# Altium PCB SQUIDCtr_Rev2.PcbDoc (part 4 of 4)
Units mil, origin at the board's own origin, x right, y up, seen from the top; angles counter-clockwise.
Board outline 5863.43 x 2940 mil, 6 copper layers (Top Layer, Internal Plane 1, Mid-Layer 1, InternalPlane 2, Mid-Layer 2, Bottom Layer), stack 62.5 mil thick; 614 components, 343 nets, 1599 pads, 475 vias.
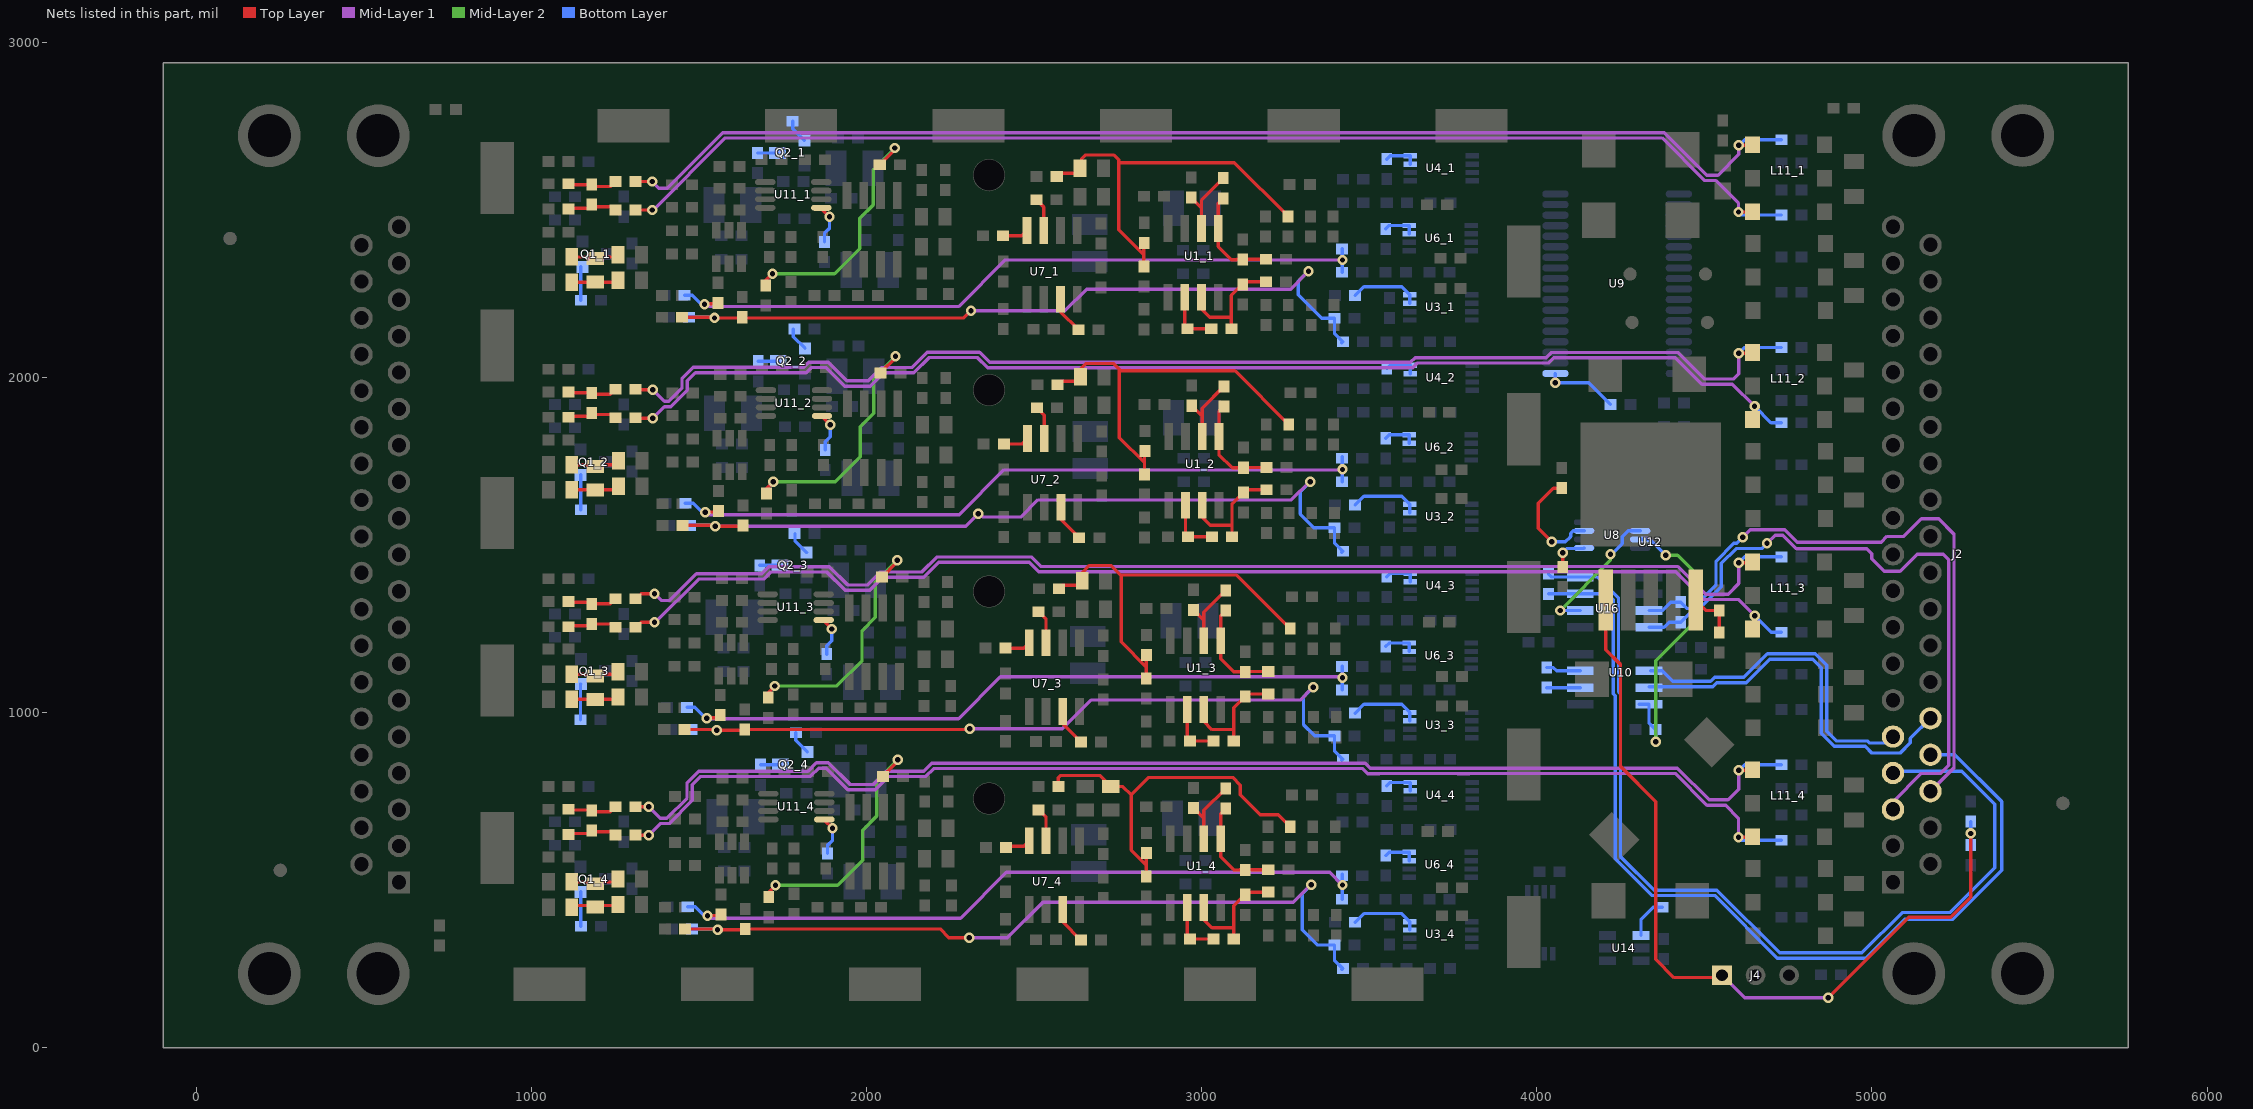
[diagram p8: the nets of this part, all layers, seen from the top]

## Via types
v1: diameter 31, hole 16, Top Layer to Bottom Layer, tented both sides, 475 vias

## Nets (pads, with @x,y where several pads share a name; then routed paths per layer and width w, separated by ;. In a path a pad name is that pad's centre, name@x,y a point inside that pad or via, vN(x,y) a via of type N, cw(c..) or ccw(c..) an arc to the next point about the centre after c; other vN are vias at no path point) (continued)
NetQ1_1_1: Q1_1.1 R6_1.1 | length 100
  Bottom Layer w10: R6_1.1@1148,2231 Q1_1.1@1148,2331
NetQ1_2_1: Q1_2.1 R6_2.1 | length 105
  Bottom Layer w10: R6_2.1@1148,1606 Q1_2.1@1148,1711
NetQ1_3_1: Q1_3.1 R6_3.1 | length 107.4
  Bottom Layer w10: R6_3.1@1147,979 1147,1085 Q1_3.1@1148,1086
NetQ1_4_1: Q1_4.1 R6_4.1 | length 103
  Bottom Layer w10: R6_4.1@1148,363 Q1_4.1@1148,466
NetQ2_1_1: Q2_1.1 R34_1.2 | length 71.5
  Bottom Layer w10: R34_1.2@1780,2765 1780,2743 Q2_1.1@1815,2708
NetQ2_1_3: Q2_1.3 R62_1.2 | length 60
  Bottom Layer w10: R62_1.2@1675,2670 Q2_1.3@1735,2670
NetQ2_2_1: Q2_2.1 R34_2.2 | length 71.5
  Bottom Layer w10: R34_2.2@1782,2144 1782,2122 Q2_2.1@1817,2087
NetQ2_2_3: Q2_2.3 R62_2.2 | length 60
  Bottom Layer w10: R62_2.2@1677,2049 Q2_2.3@1737,2049
NetQ2_3_1: Q2_3.1 R34_3.2 | length 71.5
  Bottom Layer w10: R34_3.2@1787,1535 1787,1513 Q2_3.1@1822,1478
NetQ2_3_3: Q2_3.3 R62_3.2 | length 60
  Bottom Layer w10: R62_3.2@1682,1440 Q2_3.3@1742,1440
NetQ2_4_1: Q2_4.1 R34_4.2 | length 71.5
  Bottom Layer w10: R34_4.2@1789,940 1789,918 Q2_4.1@1824,883
NetQ2_4_3: Q2_4.3 R62_4.2 | length 60
  Bottom Layer w10: R62_4.2@1684,845 Q2_4.3@1744,845
NetR1_1_2: R1_1.2 R2_1.2 R3_1.1 | length 140
  Top Layer w10: R1_1.2@1121,2360 R2_1.2@1261,2360
NetR1_2_2: R1_2.2 R2_2.2 R3_2.1 | length 140
  Top Layer w10: R1_2.2@1121,1740 R2_2.2@1261,1740
NetR1_3_2: R1_3.2 R2_3.2 R3_3.1 | length 140
  Top Layer w10: R1_3.2@1121,1115 R2_3.2@1261,1115
NetR1_4_2: R1_4.2 R2_4.2 R3_4.1 | length 140
  Top Layer w10: R1_4.2@1121,495 R2_4.2@1261,495
NetR3_1_2: R3_1.2 R5_1.2 R10_1.2 | length 142.1
  Top Layer w10: R5_1.2@1121,2285 R3_1.2@1191,2285 1256,2285 R10_1.2@1261,2290
NetR3_2_2: R3_2.2 R5_2.2 R10_2.2 | length 142.1
  Top Layer w10: R5_2.2@1121,1665 R3_2.2@1191,1665 1256,1665 R10_2.2@1261,1670
NetR3_3_2: R3_3.2 R5_3.2 R10_3.2 | length 142.1
  Top Layer w10: R5_3.2@1121,1040 R3_3.2@1191,1040 1256,1040 R10_3.2@1261,1045
NetR3_4_2: R3_4.2 R5_4.2 R10_4.2 | length 142.1
  Top Layer w10: R5_4.2@1121,420 1126,425 R10_4.2@1261,425
NetR8_1_1: R8_1.1 R9_1.1 U1_1.6 | length 168.3
  Top Layer w10: U1_1.6@2950,2240 2950,2154 R9_1.1@2958,2146 R8_1.1@3029,2146
NetR8_1_2: R8_1.2 R13_1.1 R14_1.1 U1_1.7 | length 353.9
  Top Layer w10: U1_1.7@3000,2240 3000,2204 3024,2180 3089,2180 ; R8_1.2@3089,2146 3089,2180 ; R13_1.1@3192,2286 3131,2286 R14_1.1@3123,2278 3122,2278 3089,2245 3089,2180
NetR8_2_1: R8_2.1 R9_2.1 U1_2.6 | length 168.3
  Top Layer w10: U1_2.6@2952,1619 2952,1533 R9_2.1@2960,1525 R8_2.1@3031,1525
NetR8_2_2: R8_2.2 R13_2.1 R14_2.1 U1_2.7 | length 353.9
  Top Layer w10: U1_2.7@3002,1619 3002,1583 3026,1559 3091,1559 ; R8_2.2@3091,1525 3091,1559 ; R13_2.1@3194,1665 3133,1665 R14_2.1@3125,1657 3124,1657 3091,1624 3091,1559
NetR8_3_1: R8_3.1 R9_3.1 U1_3.6 | length 168.3
  Top Layer w10: U1_3.6@2957,1010 2957,924 R9_3.1@2965,916 R8_3.1@3036,916
NetR8_3_2: R8_3.2 R13_3.1 R14_3.1 U1_3.7 | length 353.9
  Top Layer w10: U1_3.7@3007,1010 3007,974 3031,950 3096,950 ; R8_3.2@3096,916 3096,950 ; R13_3.1@3199,1056 3138,1056 R14_3.1@3130,1048 3129,1048 3096,1015 3096,950
NetR8_4_1: R8_4.1 R9_4.1 U1_4.6 | length 168.3
  Top Layer w10: U1_4.6@2957,419 2957,333 R9_4.1@2965,325 R8_4.1@3036,325
NetR8_4_2: R8_4.2 R13_4.1 R14_4.1 U1_4.7 | length 353.9
  Top Layer w10: U1_4.7@3007,419 3007,383 3031,359 3096,359 ; R8_4.2@3096,325 3096,359 ; R13_4.1@3199,465 3138,465 R14_4.1@3130,457 3129,457 3096,424 3096,359
NetR15_1: R15.1 U10.6 | length 100
  Bottom Layer w10: R15.1@4030,1075 U10.6@4130,1075
NetR15_2: R15.2 U10.7 | length 104.1
  Bottom Layer w10: R15.2@4030,1135 4050,1135 4060,1125 U10.7@4130,1125
NetR16_1: R16.1 U9.1 | length 219.6
  Bottom Layer w10: U9.1@4055.94,2012.28 4055,2011.34 v1(4055,1985) 4155,1985 R16.1@4220,1920
NetR19_1_1: R19_1.1 R20_1.1 R21_1.1 | length 148.3
  Top Layer w10: R19_1.1@1111,2575 1176,2575 1181,2570 1236,2570 R20_1.1@1251,2585
NetR19_2_1: R19_2.1 R20_2.1 R21_2.1 | length 148.3
  Top Layer w10: R19_2.1@1111,1955 1176,1955 1181,1950 1236,1950 R20_2.1@1251,1965
NetR19_3_1: R19_3.1 R20_3.1 R21_3.1 | length 148.3
  Top Layer w10: R19_3.1@1111,1330 1176,1330 R21_3.1@1181,1325 1236,1325 R20_3.1@1251,1340
NetR19_4_1: R19_4.1 R20_4.1 R21_4.1 | length 148.3
  Top Layer w10: R19_4.1@1111,710 1176,710 1181,705 1236,705 R20_4.1@1251,720
NetR21_1_2: R21_1.2 R36_1.1 R37_1.1 | length 146.2
  Top Layer w10: R36_1.1@1111,2505 1176,2505 1181,2510 1241,2510 R37_1.1@1251,2500
NetR21_2_2: R21_2.2 R36_2.1 R37_2.1 | length 146.2
  Top Layer w10: R36_2.1@1111,1885 1176,1885 1181,1890 1241,1890 R37_2.1@1251,1880
NetR21_3_2: R21_3.2 R36_3.1 R37_3.1 | length 146.2
  Top Layer w10: R36_3.1@1111,1260 1176,1260 R21_3.2@1181,1265 1241,1265 R37_3.1@1251,1255
NetR21_4_2: R21_4.2 R36_4.1 R37_4.1 | length 146.2
  Top Layer w10: R36_4.1@1111,640 1176,640 1181,645 1241,645 R37_4.1@1251,635
NetR22_1_1: R22_1.1 U4_1.3 U4_1.4 | length 99.1
  Bottom Layer w10: R22_1.1@3552.5,2652 3562.5,2662 U4_1.4@3622.5,2662 U4_1.3@3622.5,2637
NetR22_2_1: R22_2.1 U4_2.3 U4_2.4 | length 99.1
  Bottom Layer w10: R22_2.1@3552.5,2027 3562.5,2037 U4_2.4@3622.5,2037 U4_2.3@3622.5,2012
NetR22_3_1: R22_3.1 U4_3.3 U4_3.4 | length 99.1
  Bottom Layer w10: R22_3.1@3552.5,1406 3562.5,1416 U4_3.4@3622.5,1416 U4_3.3@3622.5,1391
NetR22_4_1: R22_4.1 U4_4.3 U4_4.4 | length 99.1
  Bottom Layer w10: R22_4.1@3552.5,782 3562.5,792 U4_4.4@3622.5,792 U4_4.3@3622.5,767
NetR24_1_1: R24_1.1 U3_1.3 U3_1.4 | length 208.7
  Bottom Layer w10: R24_1.1@3458.5,2245 3484.5,2271 3597.5,2271 U3_1.4@3621.5,2247 U3_1.3@3621.5,2222
NetR24_2_1: R24_2.1 U3_2.3 U3_2.4 | length 208.7
  Bottom Layer w10: R24_2.1@3458.5,1620 3484.5,1646 3597.5,1646 U3_2.4@3621.5,1622 U3_2.3@3621.5,1597
NetR24_3_1: R24_3.1 U3_3.3 U3_3.4 | length 208.7
  Bottom Layer w10: R24_3.1@3458.5,999 3484.5,1025 3597.5,1025 U3_3.4@3621.5,1001 U3_3.3@3621.5,976
NetR24_4_1: R24_4.1 U3_4.3 U3_4.4 | length 208.7
  Bottom Layer w10: R24_4.1@3458.5,375 3484.5,401 3597.5,401 U3_4.4@3621.5,377 U3_4.3@3621.5,352
NetR26_1_1: R26_1.1 U6_1.3 U6_1.4 | length 99.1
  Bottom Layer w10: R26_1.1@3549.5,2444 3559.5,2454 U6_1.4@3619.5,2454 U6_1.3@3619.5,2429
NetR26_2_1: R26_2.1 U6_2.3 U6_2.4 | length 99.1
  Bottom Layer w10: R26_2.1@3549.5,1819 3559.5,1829 U6_2.4@3619.5,1829 U6_2.3@3619.5,1804
NetR26_3_1: R26_3.1 U6_3.3 U6_3.4 | length 99.1
  Bottom Layer w10: R26_3.1@3549.5,1198 3559.5,1208 U6_3.4@3619.5,1208 U6_3.3@3619.5,1183
NetR26_4_1: R26_4.1 U6_4.3 U6_4.4 | length 99.1
  Bottom Layer w10: R26_4.1@3549.5,574 3559.5,584 U6_4.4@3619.5,584 U6_4.3@3619.5,559
NetR32_1: R32.1 U14.1 | length 126.8
  Bottom Layer w10: U14.1@4311,335.5 4311,383 4348,420 R32.1@4375,420
NetR40_1_1: R40_1.1 R43_1.1 U1_1.2 | length 220.8
  Top Layer w10: R43_1.1@2969,2537 3000,2506 ; U1_1.2@3000,2445 3000,2506 ; R40_1.1@3065,2595 3000,2530 3000,2506
NetR40_1_2: R40_1.2 R45_1.1 R49_1.1 U1_1.1 | length 324.4
  Top Layer w10: R40_1.2@3065,2535 3050,2520 U1_1.1@3050,2445 3050,2391 3089,2352 R49_1.1@3123,2352 ; R49_1.1@3107,2353 R45_1.1@3192,2353
NetR40_2_1: R40_2.1 R43_2.1 U1_2.2 | length 220.8
  Top Layer w10: R43_2.1@2971,1916 3002,1885 ; U1_2.2@3002,1824 3002,1885 ; R40_2.1@3067,1974 3002,1909 3002,1885
NetR40_2_2: R40_2.2 R45_2.1 R49_2.1 U1_2.1 | length 324.4
  Top Layer w10: R40_2.2@3067,1914 3052,1899 U1_2.1@3052,1824 3052,1770 3091,1731 R49_2.1@3125,1731 ; R49_2.1@3109,1732 R45_2.1@3194,1732
NetR40_3_1: R40_3.1 R43_3.1 U1_3.2 | length 220.8
  Top Layer w10: R43_3.1@2976,1307 3007,1276 ; U1_3.2@3007,1215 3007,1276 ; R40_3.1@3072,1365 3007,1300 3007,1276
NetR40_3_2: R40_3.2 R45_3.1 R49_3.1 U1_3.1 | length 324.4
  Top Layer w10: R40_3.2@3072,1305 3057,1290 U1_3.1@3057,1215 3057,1161 3096,1122 R49_3.1@3130,1122 ; R49_3.1@3114,1123 R45_3.1@3199,1123
NetR40_4_1: R40_4.1 R43_4.1 U1_4.2 | length 220.8
  Top Layer w10: R43_4.1@2976,716 3007,685 ; U1_4.2@3007,624 3007,685 ; R40_4.1@3072,774 3007,709 3007,685
NetR40_4_2: R40_4.2 R45_4.1 R49_4.1 U1_4.1 | length 324.4
  Top Layer w10: R40_4.2@3072,714 3057,699 U1_4.1@3057,624 3057,570 3096,531 R49_4.1@3130,531 ; R49_4.1@3114,532 R45_4.1@3199,532
NetR46_1_1: R46_1.1 U7_1.8 | length 77.6
  Top Layer w10: R46_1.1@2408,2423 2463,2423 U7_1.8@2479,2439
NetR46_2_1: R46_2.1 U7_2.8 | length 77.6
  Top Layer w10: R46_2.1@2410,1802 2465,1802 U7_2.8@2481,1818
NetR46_3_1: R46_3.1 U7_3.8 | length 77.6
  Top Layer w10: R46_3.1@2415,1193 2470,1193 U7_3.8@2486,1209
NetR46_4_1: R46_4.1 U7_4.8 | length 77.6
  Top Layer w10: R46_4.1@2415,602 2470,602 U7_4.8@2486,618
NetR47_1_2: R47_1.2 U7_1.3 | length 113.4
  Top Layer w10: U7_1.3@2579,2234 2579,2197 R47_1.2@2633,2143
NetR47_2_2: R47_2.2 U7_2.3 | length 113.4
  Top Layer w10: U7_2.3@2581,1613 2581,1576 R47_2.2@2635,1522
NetR47_3_2: R47_3.2 U7_3.3 | length 113.4
  Top Layer w10: U7_3.3@2586,1004 2586,967 R47_3.2@2640,913
NetR47_4_2: R47_4.2 U7_4.3 | length 113.4
  Top Layer w10: U7_4.3@2586,413 2586,376 R47_4.2@2640,322
NetR64_1_2: R64_1.2 U7_1.7 | length 101.1
  Top Layer w10: R64_1.2@2507,2531 2529,2509 U7_1.7@2529,2439
NetR64_2_2: R64_2.2 U7_2.7 | length 101.1
  Top Layer w10: R64_2.2@2509,1910 2531,1888 U7_2.7@2531,1818
NetR64_3_2: R64_3.2 U7_3.7 | length 101.1
  Top Layer w10: R64_3.2@2514,1301 2536,1279 U7_3.7@2536,1209
NetR64_4_2: R64_4.2 U7_4.7 | length 101.1
  Top Layer w10: R64_4.2@2514,710 2536,688 U7_4.7@2536,618
NetR67_1: R67.1 U8.3 U10.4 | length 908.7
  Mid-Layer 2 w10: v1(4355,913.99) 4355,1155 4465,1265 4465,1425 4420.25,1469.75 4379.75,1469.75 v1@4375,1465
  Bottom Layer w10: U10.4@4305,1025 U10.4@4335,1025 4335,970 R67.1@4355,950 v1(4355,913.99) ; U8.3@4308.66,1517.2 4337.8,1517.2 v1@4382.5,1472.5
  other v1: 4385,1470
NetR68_1: R68.1 R83.2 U12.5 | length 149
  Top Layer w10: U12.5@4474.02,1336.5 4505.51,1305 R68.1@4545,1305 R83.2@4545,1240
NetR71_1_2: R71_1.2 R72_1.1 | length 746.5
  Top Layer w10: R72_1.1@1700,2275 1700,2290 v1(1720,2310) ; R71_1.2@2040,2635 2085,2680 v1(2085,2685)
  Mid-Layer 2 w10: v1(1720,2310) 1905,2310 1980,2385 1980,2475 2020,2515 2020,2620 v1(2085,2685)
NetR71_2_2: R71_2.2 R72_2.1 | length 746.5
  Top Layer w10: R72_2.1@1702,1654 1702,1669 v1(1722,1689) ; R71_2.2@2042,2014 2087,2059 v1(2087,2064)
  Mid-Layer 2 w10: v1(1722,1689) 1907,1689 1982,1764 1982,1854 2022,1894 2022,1999 v1(2087,2064)
NetR71_3_2: R71_3.2 R72_3.1 | length 746.5
  Top Layer w10: R72_3.1@1707,1045 1707,1060 v1(1727,1080) ; R71_3.2@2047,1405 2092,1450 v1(2092,1455)
  Mid-Layer 2 w10: v1(1727,1080) 1912,1080 1987,1155 1987,1245 2027,1285 2027,1390 v1(2092,1455)
NetR71_4_2: R71_4.2 R72_4.1 | length 746.5
  Top Layer w10: R72_4.1@1709,450 1709,465 v1(1729,485) ; R71_4.2@2049,810 2094,855 v1(2094,860)
  Mid-Layer 2 w10: v1(1729,485) 1914,485 1989,560 1989,650 2031,692 2031,797 v1(2094,860)
NetR74_1_2: R74_1.2 U11_1.1 | length 117.9
  Top Layer w10: U11_1.1@1865.66,2506.61 1865.66,2504.34 v1(1890,2480)
  Bottom Layer w10: R74_1.2@1875,2405 1875,2430 1890,2445 v1(1890,2480)
NetR74_2_2: R74_2.2 U11_2.1 | length 117.9
  Top Layer w10: U11_2.1@1867.66,1885.61 1867.66,1883.34 v1(1892,1859)
  Bottom Layer w10: R74_2.2@1877,1784 1877,1809 1892,1824 v1(1892,1859)
NetR74_3_2: R74_3.2 U11_3.1 | length 117.9
  Top Layer w10: U11_3.1@1872.66,1276.61 1872.66,1274.34 v1(1897,1250)
  Bottom Layer w10: R74_3.2@1882,1175 1882,1200 1897,1215 v1(1897,1250)
NetR74_4_2: R74_4.2 U11_4.1 | length 117.9
  Top Layer w10: U11_4.1@1874.66,681.61 1874.66,679.34 v1(1899,655)
  Bottom Layer w10: R74_4.2@1884,580 1884,605 1899,620 v1(1899,655)
NetR84_1: R84.1 U8.5 | length 112.2
  Top Layer w10: R84.1@4077.5,1435 v1(4077.5,1477.5)
  Bottom Layer w10: v1(4077.5,1477.5) 4090,1490 4139.72,1490 U8.5@4141.34,1491.61
NetR86_2: R86.2 U8.7 | length 335.6
  Top Layer w10: v1(4045,1510) 4005,1550 4005,1625 4050,1670 R86.2@4075,1670
  Bottom Layer w10: v1(4045,1510) 4085.76,1510 4099.83,1524.06 4099.83,1525.43 4101.5,1527.1 4101.5,1535 4109.3,1542.8 U8.7@4141.34,1542.8
NetU8_2: U8.2 U16.2 | length 417.3
  Mid-Layer 2 w10: v1(4070,1305) 4220,1455 v1(4220,1472.96)
  Bottom Layer w10: v1(4070,1305) U16.2@4130,1305 ; v1@4220,1477.96 4227.96,1477.96 4255,1505 4255,1525 4272.8,1542.8 U8.2@4308.66,1542.8
NULLER_1_N: L11_1.3 R37_1.2 R39_1.1 | length 3654.1
  Top Layer w10: R37_1.2@1321,2500 v1(1361,2500) ; v1(4602,2494) L11_1.3@4647,2494
  Mid-Layer 1 w10: v1(1361,2500) 1363.63,2500 1578.63,2715 4374,2715 4501,2588 4535,2588 4602,2521 v1(4602,2494)
  Bottom Layer w10: v1(4602,2494) 4611,2485 R39_1.1@4730,2485
NULLER_1_P: L11_1.1@4644,2695 R11_1.1 R20_1.2 | length 3646.2
  Top Layer w10: R20_1.2@1321,2585 v1(1361,2585) ; v1(4603,2693) 4648,2693 L11_1.1@4650,2695
  Mid-Layer 1 w10: v1(1361,2585) 1381,2565 1406,2565 1572,2731 4380.63,2731 4507.63,2604 4541,2604 4603,2666 v1(4603,2693)
  Bottom Layer w10: v1(4603,2693) 4620,2710 R11_1.1@4730,2710
NULLER_2_N: L11_2.3 R37_2.2 R39_2.1 | length 3691.4
  Top Layer w10: R37_2.2@1323,1879 v1(1363,1879) ; L11_2.3@4650,1875 v1(4650,1914)
  Mid-Layer 1 w10: v1@1365.63,1879 v1(1363,1879) 1397.5,1913.5 1416.63,1913.5 1466,1962.87 1466,1991 1490,2015 1820,2015 1835,2030 1880,2030 1935.5,1974.5 2012.13,1974.5 2051.63,2014 2141.63,2014 2187.63,2060 2331,2060 2361.69,2029.31 3629.94,2029.31 3644.31,2043.69 4035.69,2043.69 4051,2059 4414,2059 4493,1980 4584,1980 v1(4650,1914)
  Bottom Layer w10: v1(4650,1914) 4699,1865 R39_2.1@4730,1865
NULLER_2_P: L11_2.1@4644,2075 R11_2.1 R20_2.2 | length 3725.2
  Top Layer w10: R20_2.2@1323,1964 v1(1363,1964) ; v1(4603,2073) 4648,2073 L11_2.1@4650,2075
  Mid-Layer 1 w10: v1(1363,1964) 1397.5,1929.5 1410,1929.5 1450,1969.5 1450,1997.63 1483.37,2031 1813.37,2031 1828.37,2046 1886.63,2046 1942.13,1990.5 2005.5,1990.5 2045,2030 2135,2030 2181,2076 2337.63,2076 2368.31,2045.31 3623.31,2045.31 3637.69,2059.69 4029.06,2059.69 4044.37,2075 4420.63,2075 4499.63,1996 4588,1996 4603,2011 v1(4603,2073)
  Bottom Layer w10: v1(4603,2073) 4620,2090 R11_2.1@4730,2090
NULLER_3_N: L11_3.3 R37_3.2 R39_3.1 | length 3647.2
  Top Layer w10: R37_3.2@1328,1270 v1(1368,1270) ; L11_3.3@4650,1250 4651,1251 v1(4651,1289)
  Mid-Layer 1 w10: v1(1368,1270) 1370.63,1270 1499.63,1399 1694,1399 1715,1420 1882.37,1420 1937.06,1365.31 2010.31,1365.31 2049,1404 2171.63,1404 2216.31,1448.69 2486.31,1448.69 2514.69,1420.31 4415.06,1420.31 4497.37,1338 4602,1338 v1(4651,1289)
  Bottom Layer w10: v1(4651,1289) 4700,1240 R39_3.1@4730,1240
NULLER_3_P: L11_3.1@4644,1450 R11_3.1 R20_3.2 | length 3685.4
  Top Layer w10: R20_3.2@1328,1355 v1(1368,1355) ; v1(4603,1448) 4648,1448 L11_3.1@4650,1450
  Mid-Layer 1 w10: v1(1368,1355) 1388,1335 1413,1335 1493,1415 1687.37,1415 1708.37,1436 1889,1436 1943.69,1381.31 2003.69,1381.31 2042.37,1420 2165,1420 2209.69,1464.69 2492.94,1464.69 2521.31,1436.31 4421.69,1436.31 4504,1354 4571.28,1354 4603,1385.72 v1(4603,1448)
  Bottom Layer w10: v1(4603,1448) 4620,1465 R11_3.1@4730,1465
NULLER_4_N: L11_4.3 R37_4.2 R39_4.1 | length 3752.5
  Top Layer w10: R37_4.2@1311,635 v1(1351,635) ; v1(4602,629) L11_4.3@4647,629
  Mid-Layer 1 w10: v1@1353.63,635 v1(1351,635) 1385.5,669.5 1411.63,669.5 1481,738.87 1481,785 1506,810 1832.63,810 1857.63,835 1880,835 1945,770 2026.63,770 2066.63,810 2177.63,810 2201.31,833.69 3481.12,833.69 3496.31,818.5 3530.69,818.5 3531.19,819 3763.81,819 3764.31,818.5 3798.69,818.5 3799.19,819 4413,819 4508,724 4564,724 4602,686 v1(4602,629)
  Bottom Layer w10: v1(4602,629) 4611,620 R39_4.1@4730,620
NULLER_4_P: L11_4.1@4644,830 R11_4.1 R20_4.2 | length 3752.7
  Top Layer w10: R20_4.2@1311,720 v1(1351,720) ; v1(4603,828) 4648,828 L11_4.1@4650,830
  Mid-Layer 1 w10: v1(1351,720) 1385.5,685.5 1405,685.5 1465,745.5 1465,791.63 1499.37,826 1826,826 1851,851 1886.63,851 1951.63,786 2020,786 2060,826 2171,826 2194.69,849.69 3487.75,849.69 3502.94,834.5 3524.06,834.5 3524.56,835 3770.44,835 3770.94,834.5 3792.06,834.5 3792.56,835 4419.63,835 4514.63,740 4570.63,740 4570.81,739.81 4603,772 v1(4603,828)
  Bottom Layer w10: v1(4603,828) 4620,845 R11_4.1@4730,845
OFFSET_FILTERED_1: C51_1.1 C62_1.1 R27_1.2 R59_1.1 | length 2145.4
  Top Layer w10: v1@1517,2220 1554,2220 R59_1.1@1557,2223
  Mid-Layer 1 w10: v1(1517,2219) 1524,2212 2275,2212 2414,2351 v1(3420.5,2351)
  Bottom Layer w10: C62_1.1@1458,2246 1481,2246 1508,2219 v1(1517,2219) ; C51_1.1@3419.5,2314 R27_1.2@3419.5,2384
OFFSET_FILTERED_2: C51_2.1 C62_2.1 R27_2.2 R59_2.1 | length 2146.7
  Top Layer w10: v1@1519,1599 1556,1599 R59_2.1@1559,1602
  Mid-Layer 1 w10: v1(1519,1598) 1526,1591 2277,1591 2410.5,1724.5 3419,1724.5 v1(3420.5,1726)
  Bottom Layer w10: C62_2.1@1460,1625 1483,1625 1510,1598 v1(1519,1598) ; C51_2.1@3419.5,1689 R27_2.2@3419.5,1759 R27_2.2@3419.5,1764
OFFSET_FILTERED_3: C51_3.1 C62_3.1 R27_3.2 R59_3.1 | length 2134.4
  Top Layer w10: v1@1524,985 R59_3.1@1561,985 ; R59_3.1@1561,990 R59_3.1@1564,993
  Mid-Layer 1 w10: v1@1524,989 1531,982 2275,982 2400,1107 3418.5,1107 v1(3420.5,1105)
  Bottom Layer w10: C62_3.1@1465,1016 1488,1016 1515,989 v1@1524,989 ; C51_3.1@3419.5,1068 R27_3.2@3419.5,1138 R27_3.2@3419.5,1139
  other v1: 1524,984
OFFSET_FILTERED_4: C51_4.1 C62_4.1 R27_4.2 R59_4.1 | length 2156.3
  Top Layer w10: v1@1526,395 1563,395 R59_4.1@1566,398
  Mid-Layer 1 w10: v1(1526,394) 1533,387 2281,387 2418,524 3382.5,524 v1(3420.5,486)
  Bottom Layer w10: C62_4.1@1467,421 1490,421 1517,394 v1(1526,394) ; C51_4.1@3419.5,444 R27_4.2@3419.5,514 R27_4.2@3419.5,519
POWERENABLE: J4.1 R18.1 R87.1 U12.1 | length 2511.2
  Top Layer w10: U12.1@4205.98,1336.5 4205.98,1188.02 4250,1144 4250,840 4355,735 4355,264.5 4409.5,210 4546,210 J4.1@4553,217 ; v1(4870,150) 5110,390 5235,390 5295,450 v1(5295,640)
  Mid-Layer 1 w10: J4.1@4553,217 4620,150 v1(4870,150)
  Bottom Layer w10: R87.1@5295,605 v1(5295,640) R18.1@5295,675
REF_2V5_1: C53_1.2 L7_1.1 R44_1.1 R69_1.2 R70_1.2 | length 1195.8
  Top Layer w10: C53_1.2@2568,2600 2578,2610 2637,2610 L7_1.1@2637,2624 2642.5,2629.5 2642.5,2653.5 2653,2664 2739,2664 2753,2650 2753,2641 ; R69_1.2@2828,2332 2828,2366.5 ; R70_1.2@2829,2402 2828,2401 2828,2366.5 ; R44_1.1@3258,2481 3098,2641 2753,2641 ; 2753,2641 2753,2441.5 2828,2366.5
REF_2V5_2: C53_2.2 L7_2.1 R44_2.1 R69_2.2 R70_2.2 | length 1192.7
  Top Layer w10: C53_2.2@2570,1979 2580,1989 2639,1989 L7_2.1@2639,2003 2639,2027 2654,2042 2738,2042 2755,2025 2755,2020 ; R69_2.2@2830,1711 2830,1745.5 ; R70_2.2@2831,1781 2830,1780 2830,1745.5 ; R44_2.1@3260,1860 3100,2020 2755,2020 ; 2755,2020 2755,1820.5 2830,1745.5
REF_2V5_3: C53_3.2 L7_3.1 R44_3.1 R69_3.2 R70_3.2 | length 1194.5
  Top Layer w10: C53_3.2@2575,1370 2585,1380 2644,1380 L7_3.1@2644,1394 2644,1418 2665.5,1439.5 2729.5,1439.5 2759,1410 ; R69_3.2@2835,1102 2835,1136.5 ; R70_3.2@2836,1172 2835,1171 2835,1136.5 ; R44_3.1@3265,1251 3105,1411 2760,1411 2760,1211.5 2835,1136.5
REF_2V5_4: C53_4.2 L7_4.1 R44_4.1 R69_4.2 R70_4.2 | length 1142.9
  Top Layer w10: C53_4.2@2573,780 2573,806 2580,813 2696,813 L7_4.1@2729,780 2765,780 2790,755 ; R69_4.2@2835,511 2835,545.5 ; R70_4.2@2836,581 2835,580 2835,545.5 ; R44_4.1@3265,660 3229,696 3175,696 3116,755 3116,784 3093,807 2842,807 2790,755 ; 2790,755 2790,590.5 2835,545.5
SCL_N: J2.3 R75.1 U16.8 | length 1978.3
  Mid-Layer 1 w10: v1(4687,1506) 4711,1530 4734,1530 4775,1489 4985,1489 5000,1474 5000,1459 5037,1422 5084,1422 5135,1473 5213,1473 5229,1457 5229,843 5205,819 5147,819 5063.08,735.08 J2.3@5063.08,711.7
  Bottom Layer w10: U16.8@4335,1255 4380,1255 4395,1270 R75.1@4430,1270 4455,1295 4470.25,1295 4551,1375.75 4551,1446 4595,1490 4671,1490 v1(4687,1506)
SCL_P: J2.22 R75.2 U16.7 | length 1926.1
  Mid-Layer 1 w10: v1(4615,1524) 4637,1546 4740.63,1546 4777.63,1509 5028,1509 5045,1526 5095,1526 5148,1579 5199,1579 5245,1533 5245,836.1 J2.22@5174.89,765.99
  Bottom Layer w10: U16.7@4335,1305 4375,1305 4400,1330 R75.2@4430,1330 4449,1311 4463.63,1311 4535,1382.37 4535,1452.63 4588.37,1506 4597,1506 v1(4615,1524)
SDA_MISO_N: J2.5 U10.2 | length 1003.4
  Bottom Layer w10: U10.2@4340,1125 4375,1125 4406.37,1093.63 4518.69,1093.63 4531.06,1106 4618.37,1106 4688.37,1176 4830.63,1176 4865,1141.63 4865,945 4894,916 4986.63,916 4992.63,910 5044.06,910 J2.5@5063.08,929.02
SDA_MISO_P: J2.24 U10.3 | length 1155.8
  Bottom Layer w10: U10.3@4335,1077.63 4525.31,1077.63 4537.69,1090 4625,1090 4695,1160 4824,1160 4849,1135 4849,938.37 4887.37,900 4980,900 5000,880 5085,880 5115,910 5115,923.43 J2.24@5174.89,983.31
SDA_MOSI_N: J2.4 R76.1 U16.4 | length 2892.8
  Bottom Layer w10: R76.1@4035,1415 4045,1405 U16.4@4130,1405 4182.63,1405 4244,1343.63 4244,1063.37 4250,1057.37 4250,571 4350,471 4537.63,471 4724.63,284 4970,284 5090,404 5233,404 5367,538 5367,727 5268,826 J2.4@5059,826
SDA_MOSI_P: J2.23 R76.2 U16.3 | length 2835.1
  Bottom Layer w10: R76.2@4035,1355 U16.3@4130,1355 4210,1355 4228,1337 4228,1056.75 4234,1050.75 4234,564.37 4343.37,455 4531,455 4718,268 4982.28,268 5098.28,384 5241.28,384 5387,529.72 5387,735.28 5247.8,874.49 J2.23@5174.89,874.49
SQUID_BIAS_FILTERED_1: C13_1.1 C61_1.1 R41_1.2 R51_1.1 R81_1.1 | length 2316.7
  Top Layer w10: R81_1.1@1440,2180 R81_1.1@1443,2183 ; R81_1.1@1450,2180 1545,2180 v1(1547,2178) 2291,2178 v1(2312,2199)
  Mid-Layer 1 w10: v1(2312,2199) 2592,2199 2657,2264 3266,2264 v1(3319,2317)
  Bottom Layer w10: C61_1.1@1476,2180 1543,2180 1547,2184 v1(1547,2178) ; v1(2312,2199) v1@2314,2201 ; v1(3319,2317) 3289,2287 3289,2247 3359,2177 R41_1.2@3396.5,2177 3396.5,2132 C13_1.1@3421.5,2107 C13_1.1@3418.5,2104
SQUID_BIAS_FILTERED_2: C13_2.1 C61_2.1 R41_2.2 R51_2.1 R81_2.1 | length 2415.9
  Top Layer w10: R81_2.1@1442,1559 R81_2.1@1445,1562 ; R81_2.1@1452,1559 1547,1559 v1(1549,1557) 1630,1557 R51_2.1@1632,1559
  Mid-Layer 1 w10: v1(1549,1557) 2297,1557 v1(2334,1594) 2338,1594 2348,1584 2461,1584 2512,1635 3268,1635 v1@3324,1691
  Bottom Layer w10: C61_2.1@1478,1559 1545,1559 1549,1563 v1(1549,1557) ; v1(3324,1689) 3294,1659 3294,1593 3335,1552 R41_2.2@3396.5,1552 3396.5,1507 C13_2.1@3421.5,1482 C13_2.1@3418.5,1479
SQUID_BIAS_FILTERED_3: C13_3.1 C61_3.1 R41_3.2 R51_3.1 R81_3.1 | length 2329.6
  Top Layer w10: R81_3.1@1447,950 R81_3.1@1450,953 ; R81_3.1@1457,950 1552,950 v1(1554,948) 1635,948 R51_3.1@1637,950 2306,950 v1(2308,952)
  Mid-Layer 1 w10: v1(2308,952) 2584,952 2670,1038 3294,1038 3327.5,1071.5 v1@3337.5,1071.5
  Bottom Layer w10: C61_3.1@1483,950 1550,950 1554,954 v1(1554,948) ; v1(3333,1076) 3304,1047 3304,965 3338,931 R41_3.2@3396.5,931 3396.5,886 C13_3.1@3421.5,861 C13_3.1@3418.5,858
SQUID_BIAS_FILTERED_4: C13_4.1 C61_4.1 R41_4.2 R51_4.1 R81_4.1 | length 2375.1
  Top Layer w10: R81_4.1@1449,355 R81_4.1@1452,358 ; R81_4.1@1459,355 1554,355 v1(1556,353) 1637,353 R51_4.1@1639,355 2220,355 2246,329 v1(2307,329)
  Mid-Layer 1 w10: v1(2307,329) 2421,329 2527,435 3274,435 3326,487 v1(3327,487) v1@3328,487
  Bottom Layer w10: C61_4.1@1485,355 1552,355 1556,359 v1(1556,353) ; v1(3327,487) 3300,460 3300,353 3346,307 R41_4.2@3396.5,307 3396.5,262 C13_4.1@3421.5,237 C13_4.1@3418.5,234
pads on no net: FM1.0 FM1.1 FM2.0 FM2.1 FM3.0 FM3.1 L2_1.1@4643,2444 L2_2.1@4643,1824 L2_3.1@4643,1199 L2_4.1@4643,579 L11_1.1@4641,2739 L11_2.1@4641,2119 L11_3.1@4641,1494 L11_4.1@4641,874 U1_1.0 U1_2.0 U1_3.0 U1_4.0 U5_1.0 U5_1.7 U5_2.0 U5_2.7 U5_3.0 U5_3.7 U5_4.0 U5_4.7 U7_1.0 U7_1.5 U7_2.0 U7_2.5 U7_3.0 U7_3.5 U7_4.0 U7_4.5 U8.6 U9.27 U9.28 U9.29 U9.30 U9.31 U9.32 U10.0 U11_1.5 U11_1.8 U11_2.5 U11_2.8 U11_3.5 U11_3.8 U11_4.5 U11_4.8 U16.0
copper on no net:
  other v1: 4234,166 4167,194 4102,731

## Polygon pours and split planes (outlines as drawn)
5VD on Mid-Layer 2 "Poly5VD" (solid, pour order 2): 4299,2840 4592.81,2840 4594,243.35 4594,149 4593.41,149.98 4296,149.98
GND on Mid-Layer 2 "Bottom Layer-No Net" (solid, pour order 3): 190,2842 190,103.93 5487.95,103.93 5489,103 5489,2841.07
GND on Mid-Layer 1 "Bottom Layer-No Net" (solid, pour order 5): 190,2829.29 190,110.71 5489,110.71 5489,2829
5VA on Internal Plane 1 (split plane): 5467,20.1 481,20.1 481,2919.9 5467,2919.9
5VA on Internal Plane 1 (split plane): -14,20.1 -78.33,20.1 -78.33,2919.9 -14,2919.9
GND on InternalPlane 2 (split plane): 5474,20.1 477,20.1 477,2919.9 5474,2919.9
GND on InternalPlane 2 (split plane): -18,20.1 -78.33,20.1 -78.33,2919.9 -18,2919.9

## Other copper
Top Layer:
  text "L1 (TOP) .GTL" at -2612.5,2638.5 h100
Mid-Layer 1:
  pour cut-out: 1500,2465 1500,2315 1575,2315 1575,2363.36 1550,2365 1540,2390 1550,2415 1575,2416.64 1575,2465
  pour cut-out: 1500,2465 1500,2315 1575,2315 1575,2363.36 1550,2365 1540,2390 1550,2415 1575,2416.64 1575,2465
  pour cut-out: 1509,640 1509,490 1584,490 1584,538.36 1559,540 1549,565 1559,590 1584,591.64 1584,640
  pour cut-out: 1507,1235 1507,1085 1582,1085 1582,1133.36 1557,1135 1547,1160 1557,1185 1582,1186.64 1582,1235
  pour cut-out: 1502,1844 1502,1694 1577,1694 1577,1742.36 1552,1744 1542,1769 1552,1794 1577,1795.64 1577,1844
  pour cut-out: 1969.25,475.25 1969.25,770.75 1839.75,770.75 1839.25,770.25 1839.25,659.23 1879.25,660.25 1879.25,610.75 1839.25,610.63 1839.25,475.25
  pour cut-out: 1967.25,1070.25 1967.25,1365.75 1837.75,1365.75 1837.25,1365.25 1837.25,1254.23 1877.25,1255.25 1877.25,1205.75 1837.25,1205.63 1837.25,1070.25
  pour cut-out: 1962.25,1679.25 1962.25,1974.75 1832.75,1974.75 1832.25,1974.25 1832.25,1863.23 1872.25,1864.25 1872.25,1814.75 1832.25,1814.63 1832.25,1679.25
  pour cut-out: 1960.25,2300.25 1960.25,2595.75 1830.75,2595.75 1830.25,2595.25 1830.25,2484.23 1870.25,2485.25 1870.25,2435.75 1830.25,2435.63 1830.25,2300.25
  pour cut-out: 850,868 3991,868 4067,842 850,842
  pour cut-out: 837,1530 2274,1530 2324,1480 3979,1480 4014,1470 4014,1457 3994,1456 2312,1456 2263,1505 837,1505
  pour cut-out: 837,2129.56 2354,2129.56 2397,2086.56 2398,2087.56 4028.09,2087.56 4027,2072 3986,2061.56 2388,2061.56 2379.24,2061 2345.43,2094.84 1533,2096.39 837,2103.56
  text "L3 (ML1) .G1" at -2610,2290 h100
Mid-Layer 2:
  pour cut-out: 1509,640 1509,490 1584,490 1584,538.36 1559,540 1549,565 1559,590 1584,591.64 1584,640
  pour cut-out: 1507,1235 1507,1085 1582,1085 1582,1133.36 1557,1135 1547,1160 1557,1185 1582,1186.64 1582,1235
  pour cut-out: 1502,1844 1502,1694 1577,1694 1577,1742.36 1552,1744 1542,1769 1552,1794 1577,1795.64 1577,1844
  pour cut-out: 1500,2465 1500,2315 1575,2315 1575,2363.36 1550,2365 1540,2390 1550,2415 1575,2416.64 1575,2465
  pour cut-out: 1969,475 1969,770.5 1839.5,770.5 1839,770 1839,658.98 1879,660 1879,610.5 1839,610.38 1839,475
  pour cut-out: 1967,1070 1967,1365.5 1837.5,1365.5 1837,1365 1837,1253.98 1877,1255 1877,1205.5 1837,1205.38 1837,1070
  pour cut-out: 1962,1679 1962,1974.5 1832.5,1974.5 1832,1974 1832,1862.98 1872,1864 1872,1814.5 1832,1814.38 1832,1679
  pour cut-out: 1960,2300 1960,2595.5 1830.5,2595.5 1830,2595 1830,2483.98 1870,2485 1870,2435.5 1830,2435.38 1830,2300
  pour cut-out: 850,868 3697.11,868 3697.11,842 850,842
  pour cut-out: 837,1530 2274,1530 2324,1480 3697.11,1480 3697.11,1456 2312,1456 2263,1505 837,1505
  pour cut-out: 837,2129.56 2354,2129.56 2397,2086.56 2398,2087.56 3696.11,2087.56 3696.11,2079 3696,2067 3696,2062 2388,2061.56 2346,2103.56 837,2103.56
  text "L5 (ML2) .G2" at -2615,1945 h100
Bottom Layer:
  text "L6 (BOT) .GBL" at -1705,1750 h100
InternalPlane 2 (plane layer: these items are gaps in the copper):
  rectangle: -18,-13 477,2948
  rectangle: 5474,0 5761,2940
  pour cut-out: 1500,2465 1500,2315 1575,2315 1575,2363.36 1550,2365 1540,2390 1550,2415 1575,2416.64 1575,2465
  pour cut-out: 1509,640 1509,490 1584,490 1584,538.36 1559,540 1549,565 1559,590 1584,591.64 1584,640
  pour cut-out: 1507,1235 1507,1085 1582,1085 1582,1133.36 1557,1135 1547,1160 1557,1185 1582,1186.64 1582,1235
  pour cut-out: 1502,1844 1502,1694 1577,1694 1577,1742.36 1552,1744 1542,1769 1552,1794 1577,1795.64 1577,1844
  pour cut-out: 1969,475 1969,770.5 1839.5,770.5 1839,770 1839,658.98 1879,660 1879,610.5 1839,610.38 1839,475
  pour cut-out: 1967,1070 1967,1365.5 1837.5,1365.5 1837,1365 1837,1253.98 1877,1255 1877,1205.5 1837,1205.38 1837,1070
  pour cut-out: 1962,1679 1962,1974.5 1832.5,1974.5 1832,1974 1832,1862.98 1872,1864 1872,1814.5 1832,1814.38 1832,1679
  pour cut-out: 1960,2300 1960,2595.5 1830.5,2595.5 1830,2595 1830,2483.98 1870,2485 1870,2435.5 1830,2435.38 1830,2300
  pour cut-out: 3059,343 3059,305 3058,304 2944,304 2944,371 2943,372 2973,372 2973,347 2975,345 3057,345
  pour cut-out: 2959,737 2958,736 2958,695 2986,695 2989,692 2989,582 3023,582 3024,581 3024,713 3061,750 3097,750 3097,768 3095,770 3048,770 3015,737 3014,738 2958,738
  pour cut-out: 3058,934 3058,896 3057,895 2943,895 2943,962 2942,963 2972,963 2972,938 2974,936 3056,936
  pour cut-out: 2958,1328 2957,1327 2957,1286 2985,1286 2988,1283 2988,1173 3022,1173 3023,1172 3023,1304 3060,1341 3096,1341 3096,1359 3094,1361 3047,1361 3014,1328 3013,1329 2957,1329
  pour cut-out: 3053,1543 3053,1505 3052,1504 2938,1504 2938,1571 2937,1572 2967,1572 2967,1547 2969,1545 3051,1545
  pour cut-out: 2953,1937 2952,1936 2952,1895 2980,1895 2983,1892 2983,1782 3017,1782 3018,1781 3018,1913 3055,1950 3091,1950 3091,1968 3089,1970 3042,1970 3009,1937 3008,1938 2952,1938
  pour cut-out: 3051,2164.88 3051,2126.88 3050,2125.88 2936,2125.88 2936,2192.88 2935,2193.88 2965,2193.88 2965,2168.88 2967,2166.88 3049,2166.88
  pour cut-out: 2951,2558.88 2950,2557.88 2950,2516.88 2978,2516.88 2981,2513.88 2981,2403.88 3015,2403.88 3016,2402.88 3016,2534.88 3053,2571.88 3089,2571.88 3089,2589.88 3087,2591.88 3040,2591.88 3007,2558.88 3006,2559.88 2950,2559.88
  lines w25: 837,2117 2342,2117 2345,2117 2386,2076 3980,2076 ; 847,1517 2271,1517 2321,1467 2353,1467 3978,1467 ; 857,853 3991,853
  text "L4 (GND) .GP2" at -2615,2110 h100
Internal Plane 1 (plane layer: these items are gaps in the copper):
  rectangle: -14,-13 481,2951
  rectangle: 5467,8 5761,2940
  pour cut-out: 1500,2465 1500,2315 1575,2315 1575,2363.36 1550,2365 1540,2390 1550,2415 1575,2416.64 1575,2465
  pour cut-out: 1509,640 1509,490 1584,490 1584,538.36 1559,540 1549,565 1559,590 1584,591.64 1584,640
  pour cut-out: 1507,1235 1507,1085 1582,1085 1582,1133.36 1557,1135 1547,1160 1557,1185 1582,1186.64 1582,1235
  pour cut-out: 1502,1844 1502,1694 1577,1694 1577,1742.36 1552,1744 1542,1769 1552,1794 1577,1795.64 1577,1844
  pour cut-out: 1969.25,475.25 1969.25,770.75 1839.75,770.75 1839.25,770.25 1839.25,659.23 1879.25,660.25 1879.25,610.75 1839.25,610.63 1839.25,475.25
  pour cut-out: 1967.25,1070.25 1967.25,1365.75 1837.75,1365.75 1837.25,1365.25 1837.25,1254.23 1877.25,1255.25 1877.25,1205.75 1837.25,1205.63 1837.25,1070.25
  pour cut-out: 1962.25,1679.25 1962.25,1974.75 1832.75,1974.75 1832.25,1974.25 1832.25,1863.23 1872.25,1864.25 1872.25,1814.75 1832.25,1814.63 1832.25,1679.25
  pour cut-out: 1960.25,2300.25 1960.25,2595.75 1830.75,2595.75 1830.25,2595.25 1830.25,2484.23 1870.25,2485.25 1870.25,2435.75 1830.25,2435.63 1830.25,2300.25
  pour cut-out: 2951,2558 2950,2557 2950,2516 2978,2516 2981,2513 2981,2403 3015,2403 3016,2402 3016,2534 3053,2571 3089,2571 3089,2589 3087,2591 3040,2591 3007,2558 3006,2559 2950,2559
  pour cut-out: 3051,2164 3051,2126 3050,2125 2936,2125 2936,2192 2935,2193 2965,2193 2965,2168 2967,2166 3049,2166
  pour cut-out: 3053,1543 3053,1505 3052,1504 2938,1504 2938,1571 2937,1572 2967,1572 2967,1547 2969,1545 3051,1545
  pour cut-out: 2953,1937 2952,1936 2952,1895 2980,1895 2983,1892 2983,1782 3017,1782 3018,1781 3018,1913 3055,1950 3091,1950 3091,1968 3089,1970 3042,1970 3009,1937 3008,1938 2952,1938
  pour cut-out: 3058,934 3058,896 3057,895 2943,895 2943,962 2942,963 2972,963 2972,938 2974,936 3056,936
  pour cut-out: 2958,1328 2957,1327 2957,1286 2985,1286 2988,1283 2988,1173 3022,1173 3023,1172 3023,1304 3060,1341 3096,1341 3096,1359 3094,1361 3047,1361 3014,1328 3013,1329 2957,1329
  pour cut-out: 3059,343 3059,305 3058,304 2944,304 2944,371 2943,372 2973,372 2973,347 2975,345 3057,345
  pour cut-out: 2959,737 2958,736 2958,695 2986,695 2989,692 2989,582 3023,582 3024,581 3024,713 3061,750 3097,750 3097,768 3095,770 3048,770 3015,737 3014,738 2958,738
  lines w25: 841.68,2117 2319,2117 2346,2117 2388,2075 3979,2075 ; 854,1516 2271,1516 2320,1467 3979,1467 ; 856,856 3981,856
  text "L2 (5VA) .GP1" at -2615,2450 h100

## Silkscreen, mask and mechanical layers (free items; w line width, h text height)
Top Overlay:
  lines w3: 175.57,335 175.57,2616 ; 5493,339 5493,2618.37
  text "MEZZ CONNECTOR" at 5104,2874 h60
  text "PreAmp" at 1444,2872 h60
  text "CRYOSTAT CONNECTOR" at -11.43,2870 h60
  text "DiffAmp" at 1939,2870 h60
  text "2.5VRef" at 2465,2863 h60
  text "RefBuff" at 2912,2861 h60
  text "Transformers" at 4596,2861 h60
  text "CH1" at 3534,2363 h60
  text "Regs" at 4060,1925 h60 r270
  text "Short Connector board edge here" at 5458,1860 h25 r270
  text "CH2" at 3537,1741 h60
  text "TOP IDENT (.GTO)" at -2642.5,1418.5 h100
  text "CH3" at 3534,1109 h60
  text "Short Connector board edge here" at 211.57,1104 h25 r90
  text "CH4" at 3528,495 h60
  text "En +5.5  Gnd" at 4501,67 h20
  text "AuxPower" at 4164,46 h60
Bottom Overlay:
  region: 195,1420 195,2120 45,2120 45,1420
  lines w3: 414.57,1472 559.57,1472 ; 447.57,2012 562.57,2012 ; 453.57,927 560.57,927 ; 5112,925 5273,925 ; 5118,1469 5263,1469 ; 5118,2010 5246,2010 ; 5222,537 5369,537
  lines w5: 3195,829 3905,829 ; 3195,1453 3905,1453 ; 3195,2075 3905,2075
  text "CRYOSTAT CONNECTOR" at 717.57,2874 h60
  text "MEZZ CONNECTOR" at 5619,2872 h60
  text "DACs" at 3663,2758 h60
  text "IOExpander" at 4375,2635 h60
  text "FluxBias" at 3300,2605 h60
  text "Offset" at 3235,2424 h60
  text "SqdBias" at 3289,2282 h60
  text "35" at 429.57,2147 h60
  text "35" at 5379,2138 h60
  text "15" at 433.57,1980 h60
  text "15" at 5375,1971 h60
  text "30" at 422.57,1605 h60
  text "30" at 5386,1596 h60
  text "10" at 401.57,1443 h60
  text "10" at 5377,1434 h60
  text "BOTTOM IDENT (.GBO)" at -1192.5,1206 h100
  text "25" at 5533,1063 h60
  text "25" at 431.57,1062 h60
  text "5" at 434.57,897 h60
  text "5" at 5330,895 h60
  text "LVDSRxTx" at 4370,820 h60
  text "Board Serial:" at 50,685 h60 r270
  text "20" at 434.57,520 h60
  text "20" at 5484,514 h60
  text "McGill Next Gen. Squid Controller" at 3180,245 h60
  text "Temp" at 4434,161 h60
  text "MGNGSQ4(Rev2)" at 1720,155 h60
  text "Made in CANADA April 2013" at 3265,150 h60
  text "HeaterDAC" at 4126,131 h60
  text "Matt.Dobbs@McGill.ca" at 3325,55 h60
  text "adamjohngilbert@gmail.com" at 2150,50 h60
Top Paste:
  text "TOP SOLDER PASTE (.GTP)" at -2692.5,786 h100
Bottom Paste:
  text "BOTTOM SOLDER PASTE (.GBP)" at -552.5,386 h100
Top Solder:
  text "TOP SOLDER MASK (.GTS)" at -2712.5,1006 h100
Bottom Solder:
  text "BOTTOM SOLDER MASK (.GBS)" at -572.5,586 h100
Mechanical 1:
  the board outline again, w4
  text "Mechanical 1 (GM1)" at -2595,-220 h100
  text "Nominal Size: 148.93mm x 74.68mm" at 2336.82,-225.11 h100
  text "Nominal Size: 5.863 x 2.940 inches" at 2341.82,-452.61 h100
  text "FINISHED BOARD: 0.062\" (Nom)  FR4" at 2333.01,-714.48 h100
  text "McGill Next Gen Squid Controller - MGNGSQ4" at -1885,-890 h100
  text "ARRANGE LAYERS SEQUENTIALLY: L1-L6" at 2306.82,-935.11 h100
  text "Rev 2 - Made in CANADA - July 2012" at -1390,-1115 h100
  text "Black Solder Mask & White Text" at 2319.5,-1117 h100
  text "Copyright 2013, McGill University" at -1361.99,-1304.48 h100
  text "RoHS" at 2330,-1315 h100
  text "Contact: Matt.Dobbs@McGill.ca  or  adamjohngilbert@gmail.com" at -1354.85,-1497.32 h60
  text "Please add Serial number e.g 001 after 'Serial Number:'" at 2243,-1830 h48
Drill Drawing:
  lines w5: 6730,3305 8580.39,3305
  lines w20: 6895.44,3085.7 7485.99,3085.7 ; 6915,2835 7426.81,2835 ; 6919.81,2202.09 7431.62,2202.09 ; 6919.81,2640.09 7431.62,2640.09 ; 6920,1915 7431.81,1915 ; 6923.19,2445 7435,2445
  text "FR4: 6 Layer PCB, Approximate Build:" at 6670,3370 h60
  text "L1" at 6368.25,3054.75 h80
  text "TopLayer 1/2 Oz + Plating" at 7525.36,3046.33 h60
  text ".GTL" at 9048.25,3034.75 h60
  text ".Legend" at -2495,2990 h100
  text "11 mils spacing (adjustable)" at 6620,2925 h60
  text "L2" at 6368.25,2814.75 h80
  text ".GP1" at 9048.25,2814.75 h60
  text "Plane 1  1 Oz" at 7513.19,2812.29 h60
  text "13 mils spacing" at 6610.71,2711.94 h60
  text "L3" at 6368.25,2614.75 h80
  text "MidLayer1 1 Oz" at 7469.9,2607.62 h60
  text ".G1" at 9055,2595 h60
  text "7.5 mils spacing" at 6618.25,2511.75 h60
  text "Plane 2   1 Oz" at 7483.19,2429.29 h60
  text "L4" at 6381,2419 h80
  text ".GP2" at 9050,2390 h60
  text "13 mils spacing" at 6615.71,2298.94 h60
  text "L5" at 6378.5,2196.5 h80
  text "MidLayer2  1 Oz" at 7488.25,2176.75 h60
  text ".G2" at 9055,2160 h60
  text "11 mils spacing (adjustable)" at 6608.21,2026.94 h60
  text "Bottom  1/2 Oz + Plating" at 7505.36,1896.33 h60
  text ".GBL" at 9045,1895 h60
  text "L6" at 6386,1866.5 h80
  text "Total thickness = .062\"" at 7075,1610 h60
  text "DRILL DRAWING (.GD1)" at -2595,-15 h100

## Text inside footprints (layer, text, board x,y; h text height)
J1: Top Overlay "1" at 745.46,483.95 h40 r90; Top Overlay "19" at 745.46,2405.41 h40 r90; Top Overlay "20" at 371.44,503.85 h40 r90; Top Overlay "37" at 371.44,2346.14 h40 r90
J2: Top Overlay "37" at 5297.13,2440.15 h40 r270; Top Overlay "1" at 5035,415 h40 r270; Top Overlay "19" at 4955,2470 h40 r270; Top Overlay "20" at 5298,583 h40 r270